# Altium PCB Instrument_droid.PcbDoc (part 1 of 2)
Units mil, origin at the board's own origin, x right, y up, seen from the top; angles counter-clockwise.
Board outline 3674.15 x 2121.53 mil, 4 copper layers (Layer1, Layer2, Layer3, Layer4), stack 23.756 mil thick; 87 components, 48 nets, 303 pads, 89 vias.
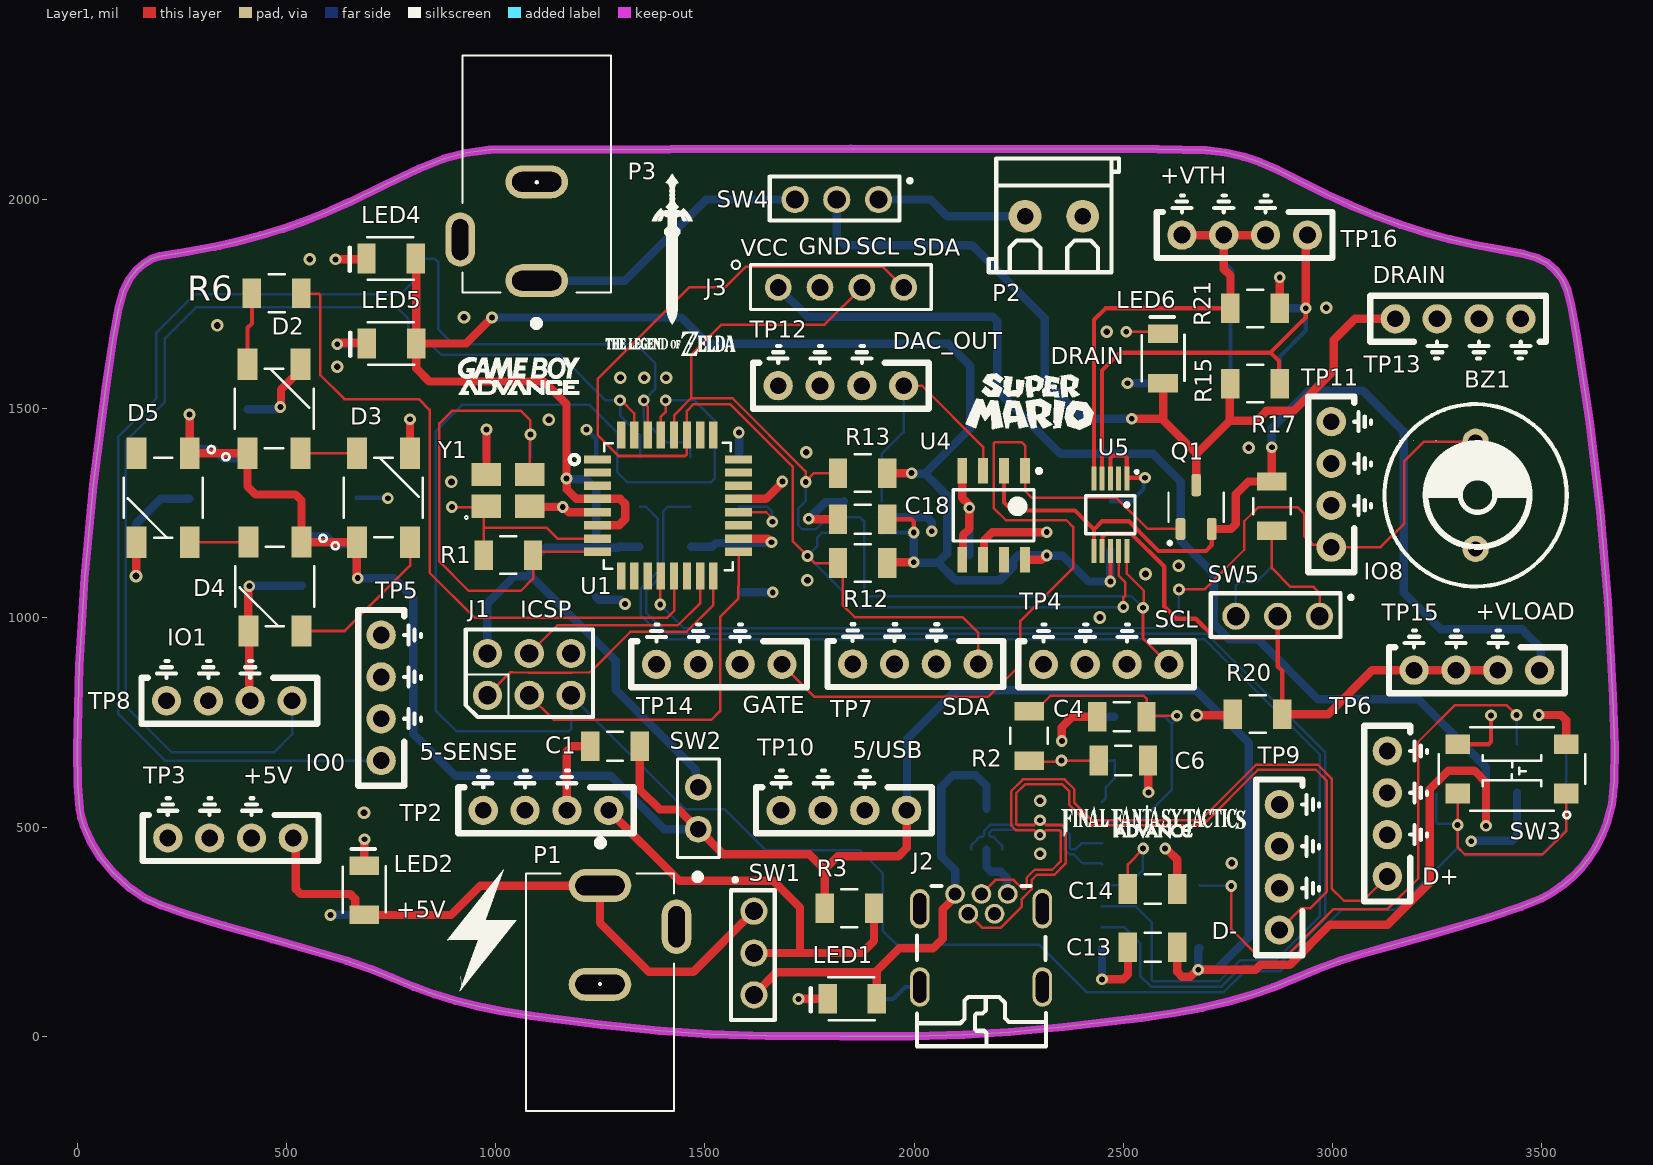
[diagram p0: Layer1 view]
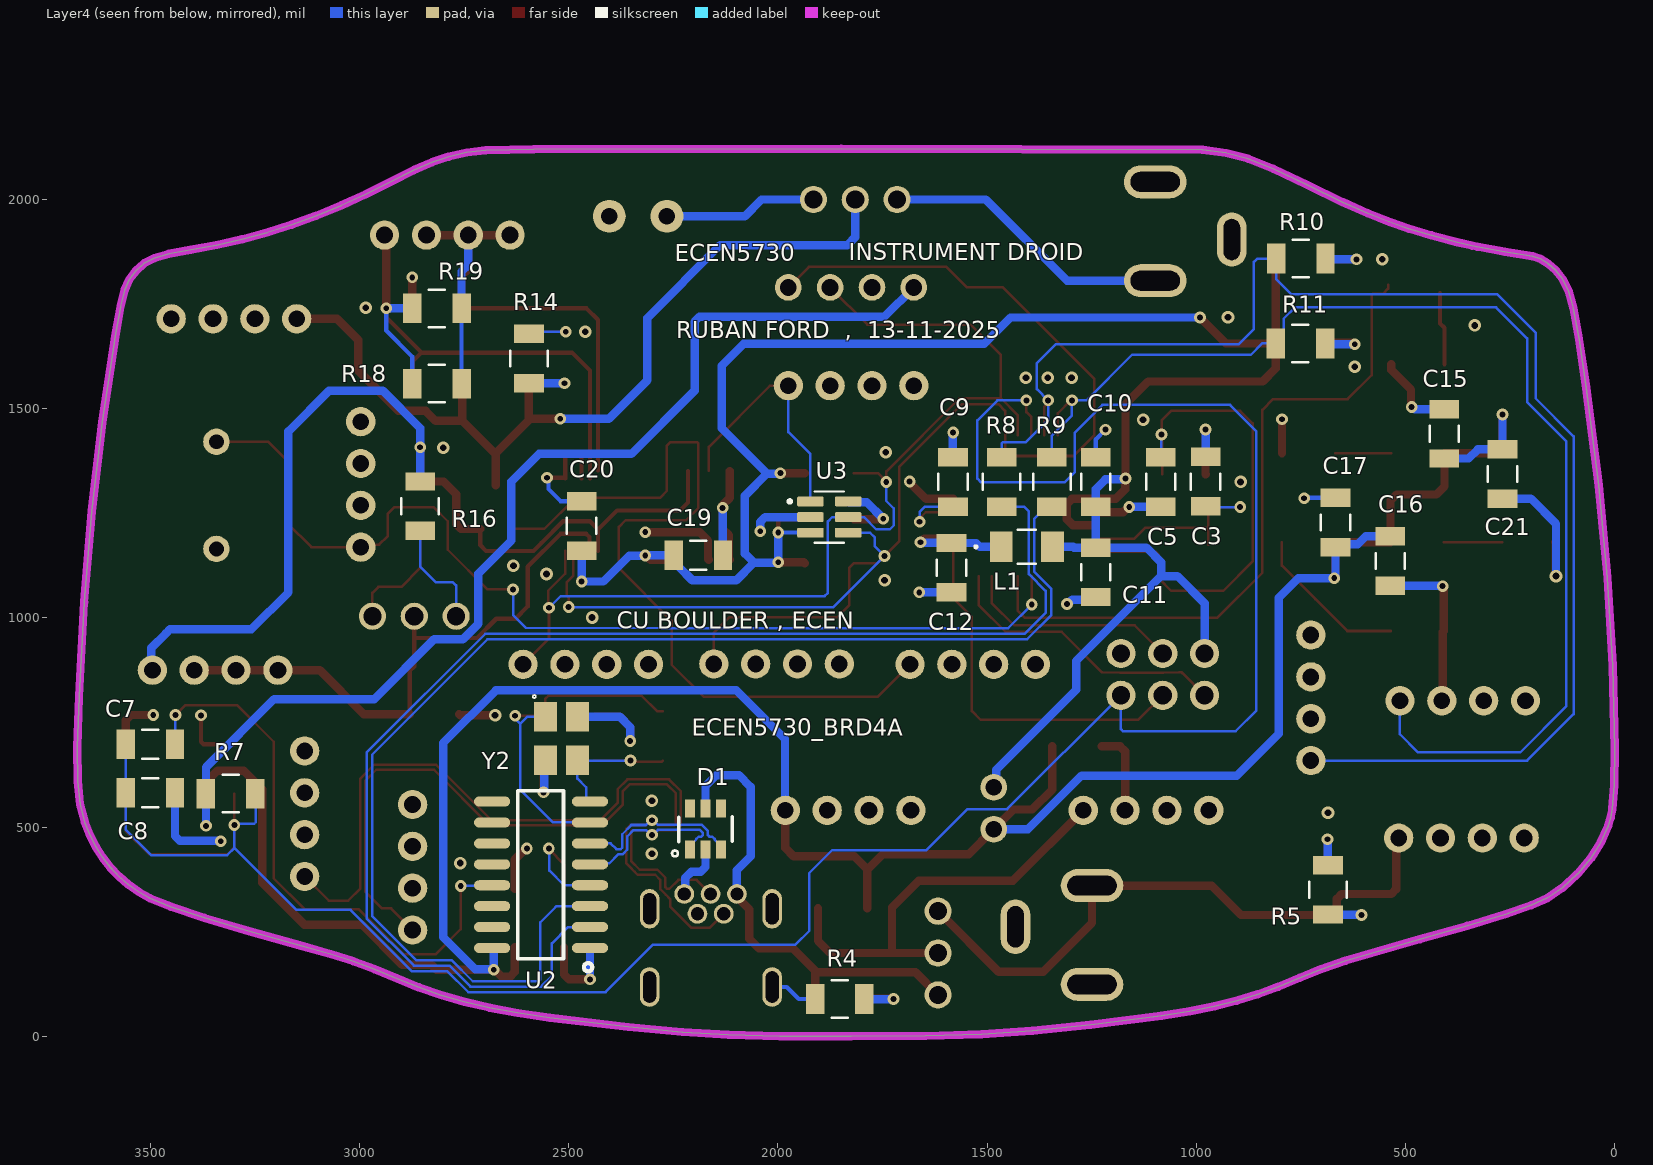
[diagram p1: Layer4 view, seen from below]
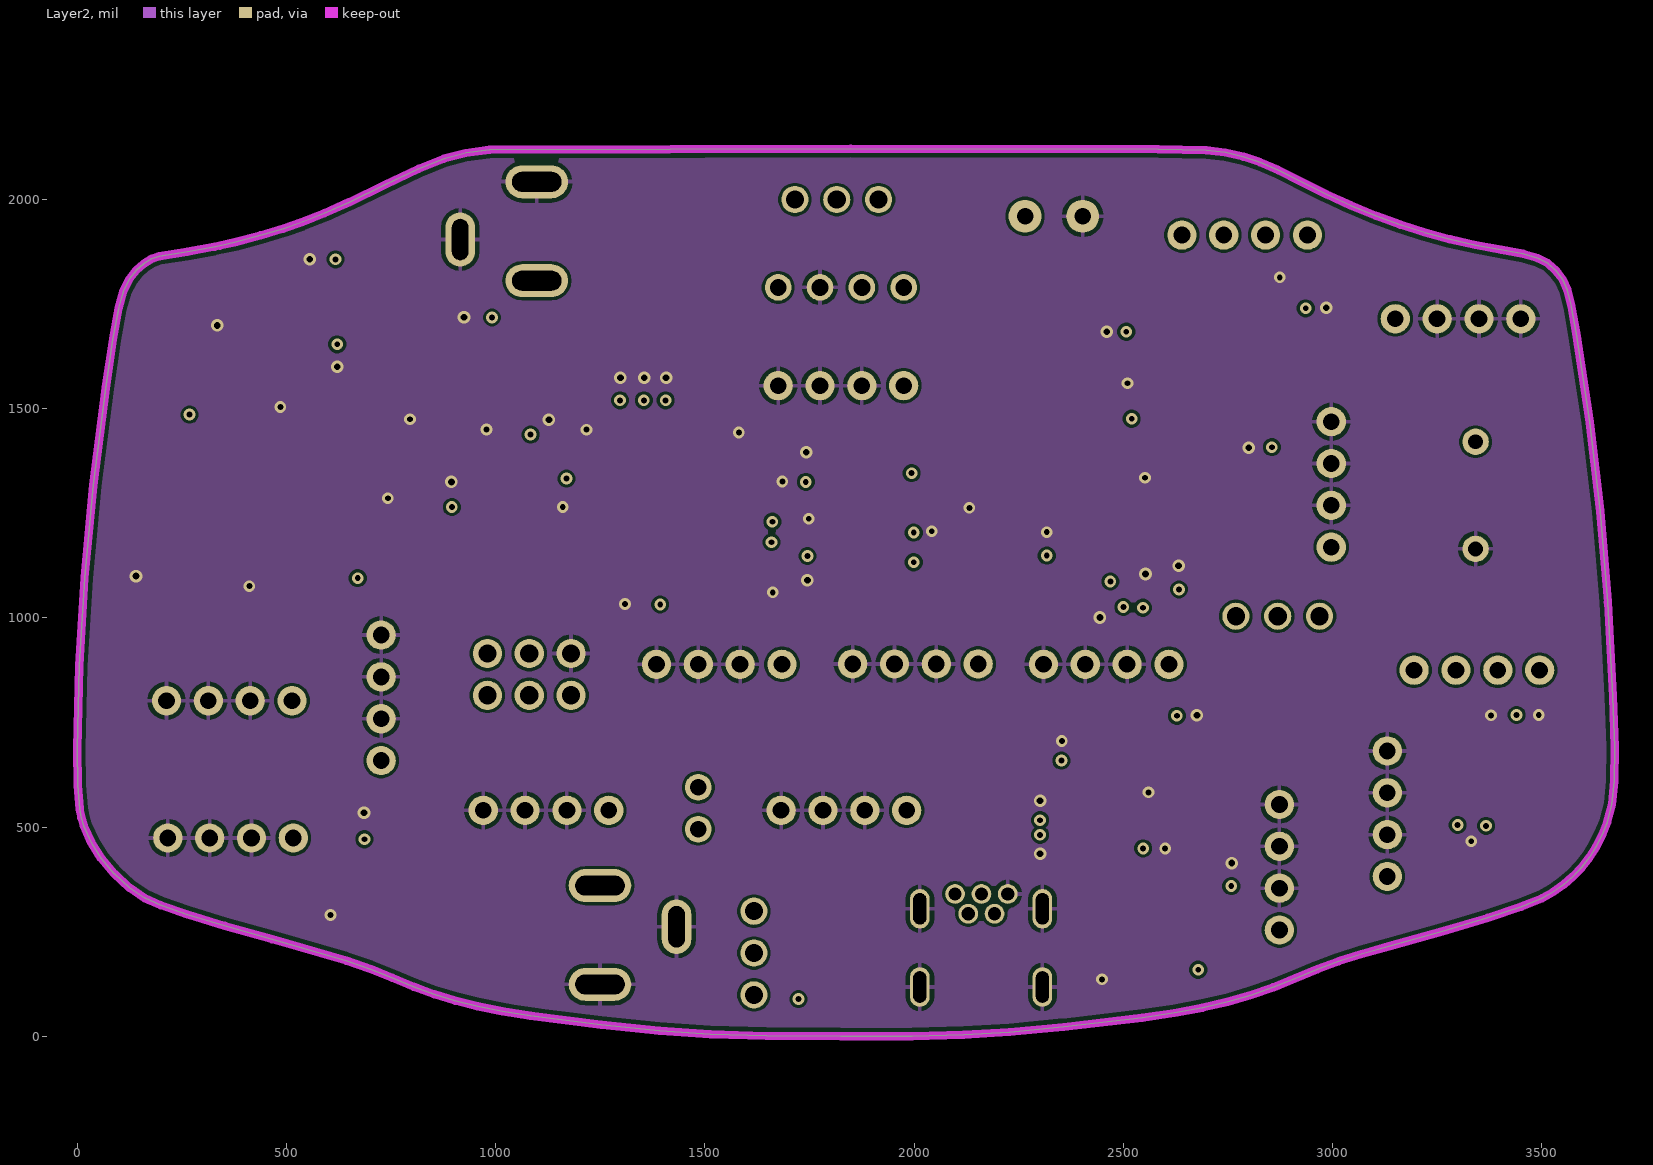
[diagram p2: Layer2]
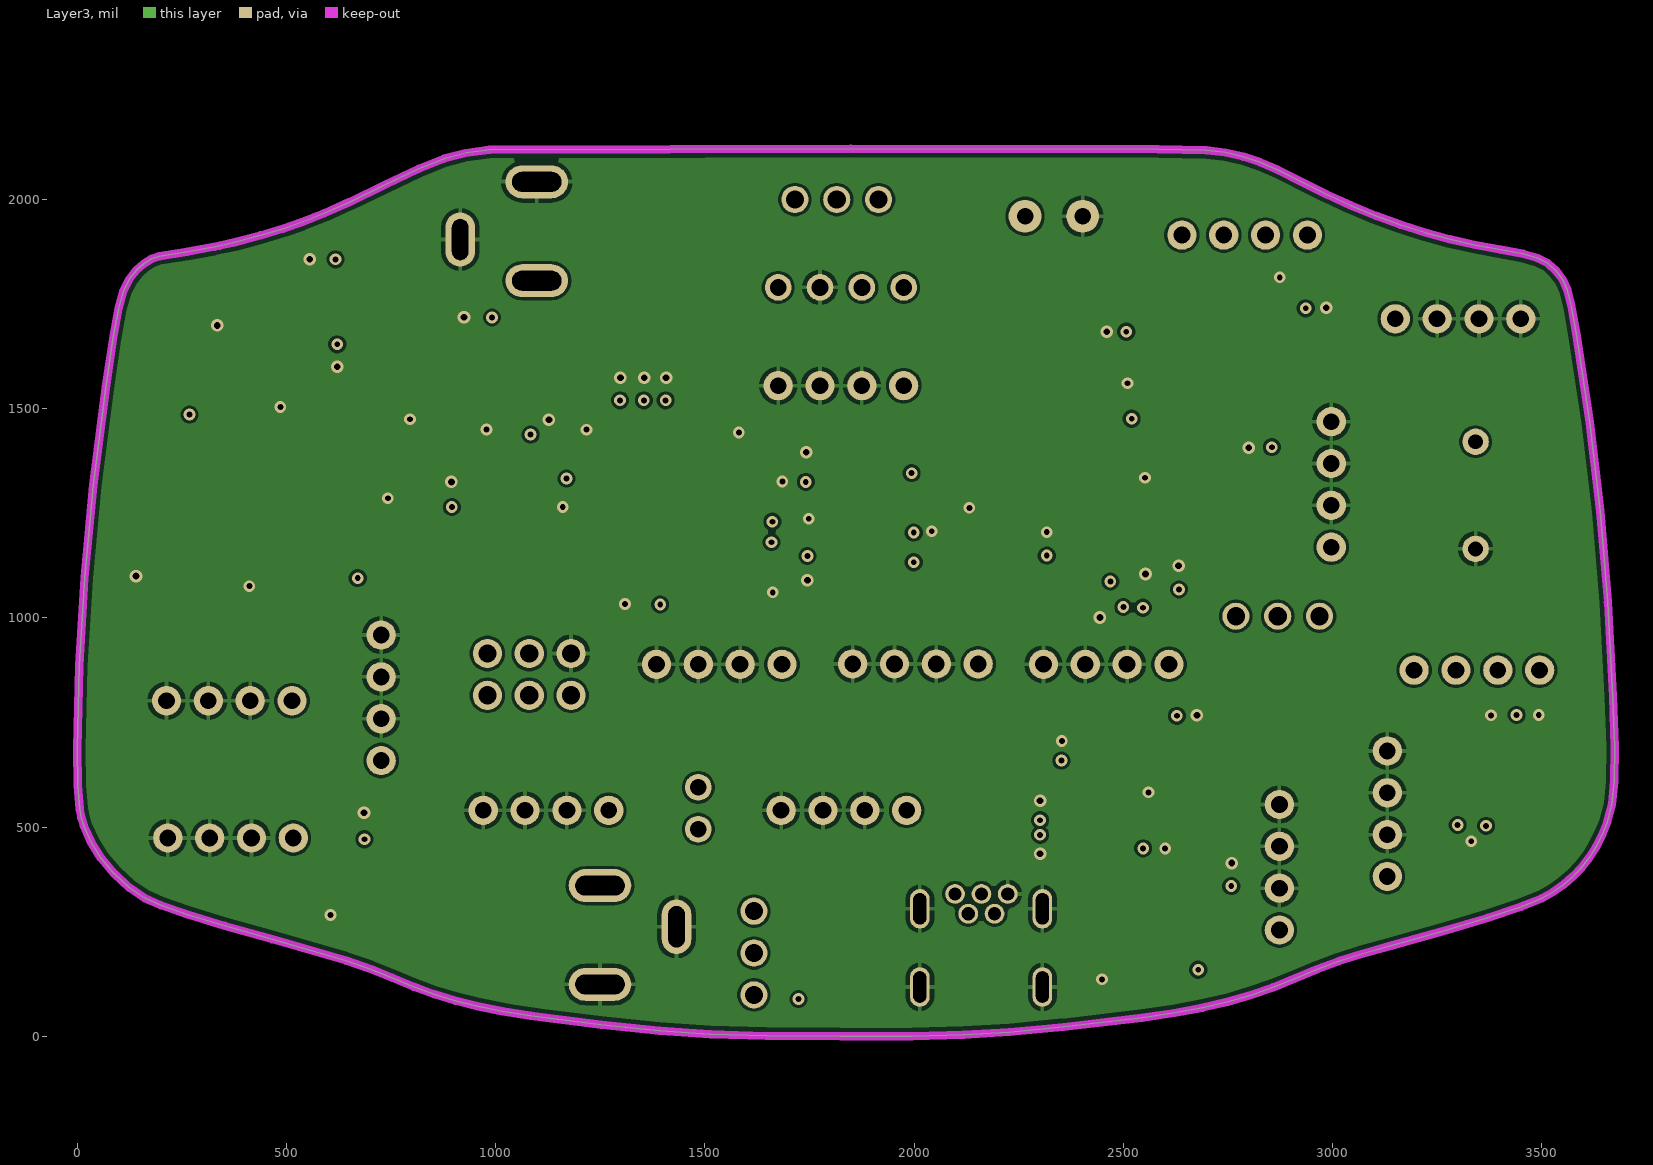
[diagram p3: Layer3]
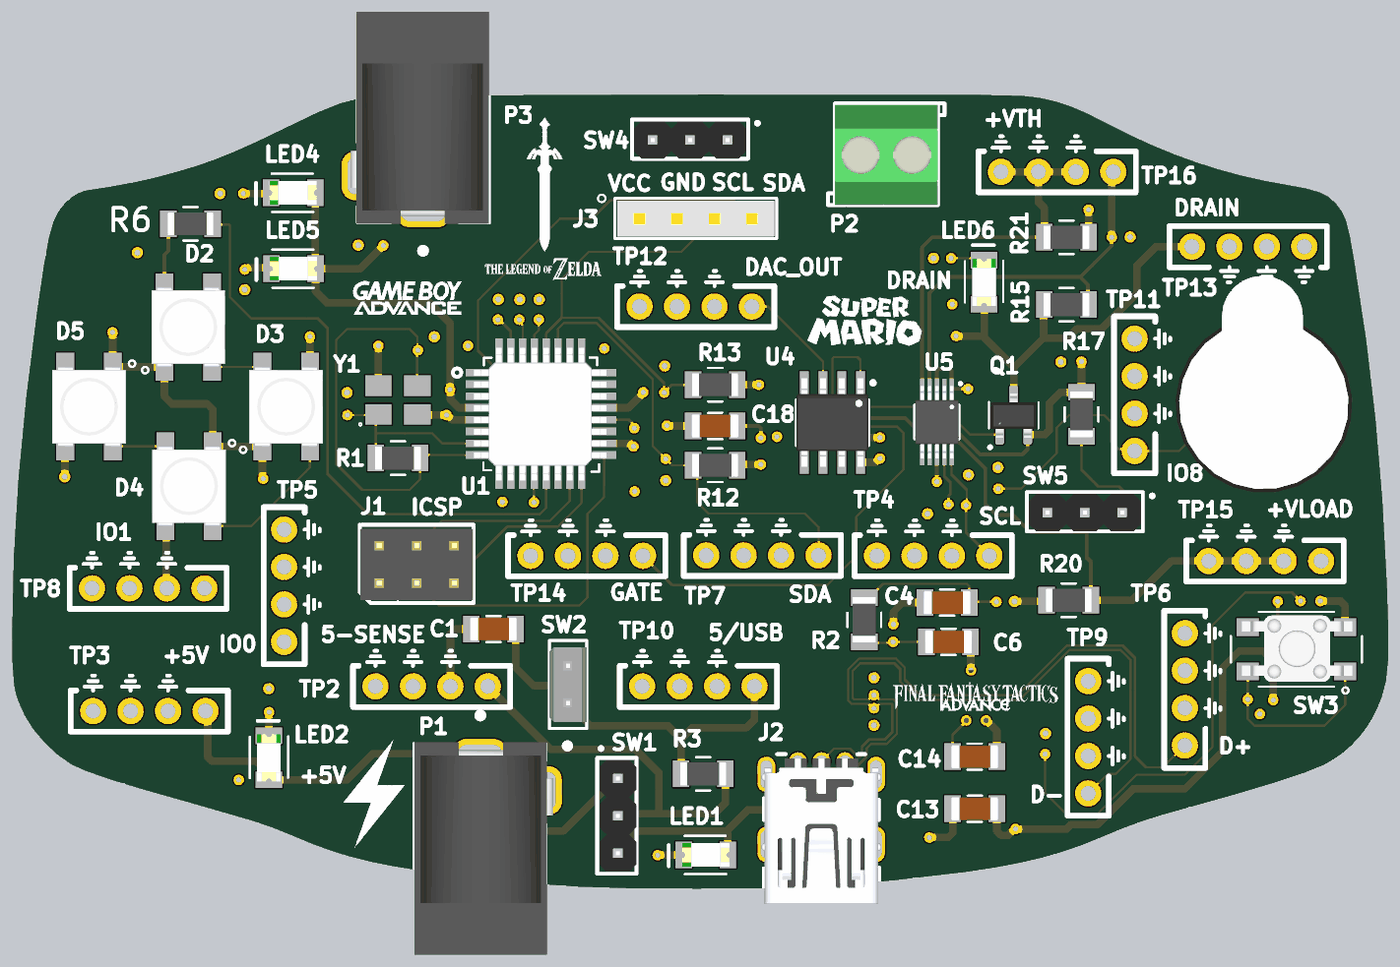
[diagram p5: 3D render of the assembled board from above, using the file's embedded part models]
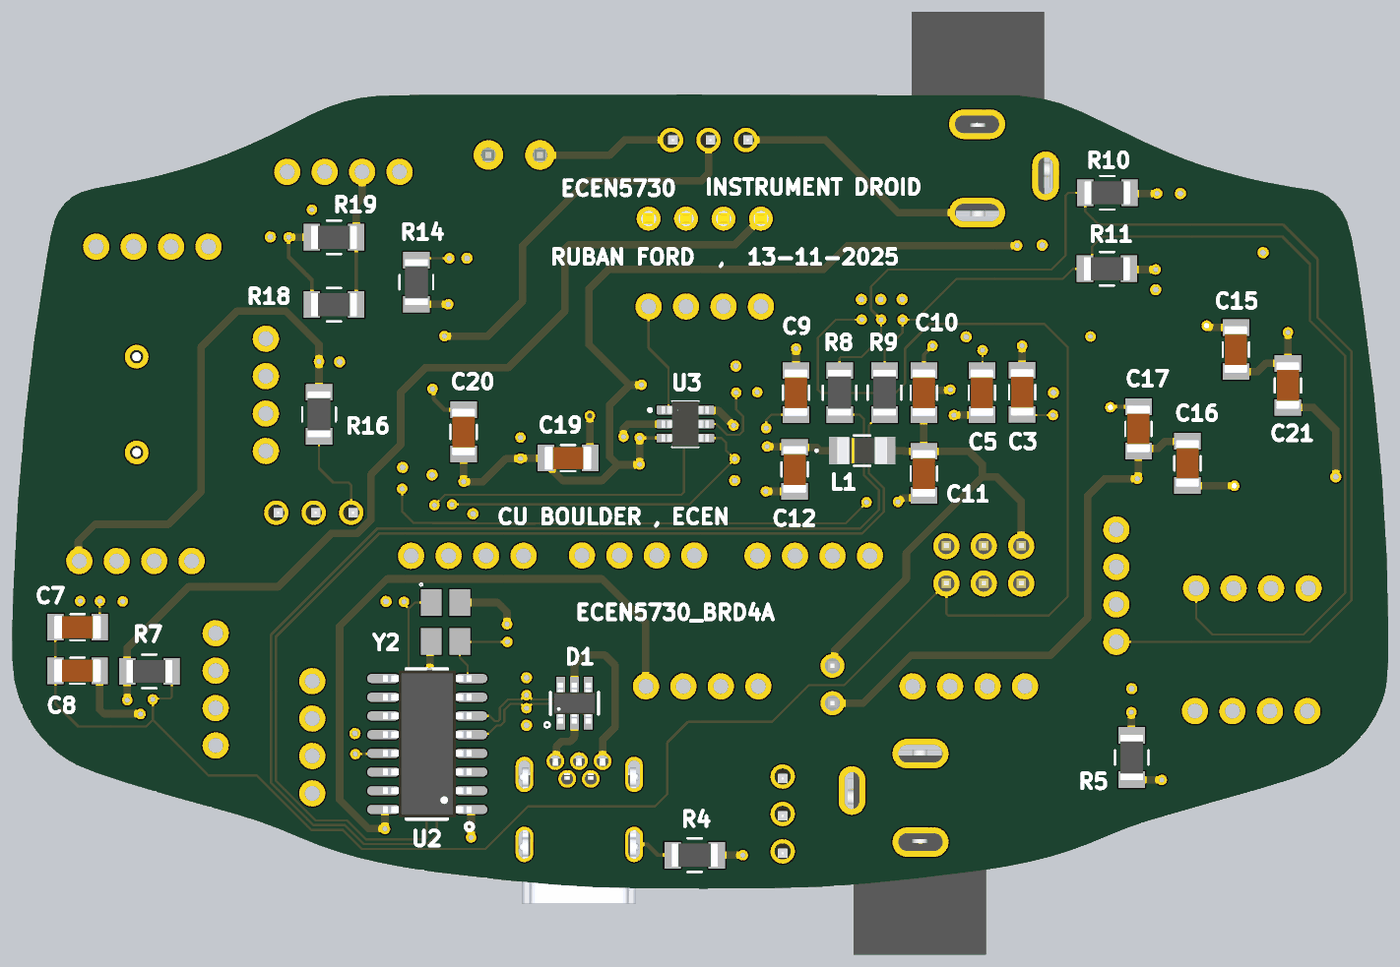
[diagram p6: 3D render of the assembled board from below, using the file's embedded part models]

## Layer stack, top to bottom
Top Solder: solder mask 0.4, Solder Resist, Dk 3.5
Layer1: signal copper 1.4
Dielectric 2: prepreg 2.8, PP-006, Dk 4.1
Layer2: signal copper 1.378
Dielectric 1: dielectric 12.6, FR-4, Dk 4.8
Layer3: signal copper 1.378
Dielectric 3: prepreg 2.8, PP-006, Dk 4.1
Layer4: signal copper 1.4
Bottom Solder: solder mask 0.4, Solder Resist, Dk 3.5

## Board outline
160,330.66 199.58,313.21 263.6,290.99 352.07,263.99 465,232.21 642.58,180.89 700.84,160.68 752.36,139.72 803.34,118.57 852.66,100.56 902.79,85.15 956.22,71.77 1015.42,59.87 1082.88,48.89 1252.5,27.46 1391.35,13.19 1512.74,4.79 1647.14,0.78 1825,-0.33 1995.1,0.28 2118.26,3.3 2227.92,10.17 2357.5,22.3 2545.57,44.15 2621.91,55.76 2689.23,68.4 2749.6,82.51 2805.1,98.52 2857.81,116.88 2909.81,138 2964.17,160.6 3014.99,179.34 3069.49,196.69 3134.88,215.13 3263.58,251.04 3370.75,283.18 3451.46,310.01 3500.79,329.98 3527.41,344.99 3552.14,362.38 3574.91,382.05 3595.63,403.91 3614.24,427.87 3630.64,453.83 3644.76,481.71 3656.52,511.41 3667.89,554.47 3673.56,609.46 3674.17,690.56 3670.39,812 3658.29,1037.81 3639.91,1254.87 3614.82,1467.52 3582.58,1680.09 3571.19,1743.81 3561.47,1783.35 3550.19,1808.68 3534.13,1829.72 3515.18,1847.28 3490.85,1860.04 3455.51,1870.17 3403.54,1879.83 3341.63,1891.21 3280.92,1904.95 3221.11,1921.16 3161.91,1939.95 3103.02,1961.41 3044.15,1985.65 2984.99,2012.76 2925.24,2042.85 2870.66,2070.42 2826.8,2089.44 2786.75,2102.58 2743.58,2112.47 2698.27,2117.81 2583.46,2120.56 1848.58,2121.2 985,2118.77 927.8,2111.27 875.82,2097.73 815.93,2073.73 735,2034.87 650.13,1993.94 590,1967.23 537.5,1946.33 492.28,1930.52 437.5,1914.25 376.25,1897.88 340,1889.87 328.66,1887.44 262.41,1875.04 196.16,1864.75 177.3,1858.28 158.46,1846.65 140.76,1830.71 125.32,1811.29 110.67,1783.11 98.24,1739.49 84.93,1666.32 67.62,1549.5 38.06,1317.04 16.95,1095.87 4.27,885.84 0.03,686.8 0.94,599.76 5.29,543.77 9.49,522.5 15.44,503.1 33.77,462 56.89,425.14 88.29,388.2 123.99,355.32

## Design rules (kind name [scope] priority, off if disabled: settings)
AssemblyTestPointUsage [All] p1: isadvanced=TRUE
AssemblyTestpoint [All] p1: isadvanced=TRUE testpointundercomponent=TRUE minsize=40 maxsize=100 preferedsize=60 minholesize=0 maxholesize=40 preferedholesize=32 testpointgrid=1 usegrid=TRUE gridtolerance=0.01 allowsidetop=TRUE allowsidebottom=TRUE
Clearance Clearance_1 [InNetClass('POWER') And (ExistsOnLayer('Layer2') Or ExistsOnLayer('Layer3')) vs InNetClass('default') And (ExistsOnLayer('Layer2') Or ExistsOnLayer('Layer3'))] p1: gap=7 ignorepadtopadclearanceinfootprint=FALSE sourcerule=56 cellrowname=POWER cellrowtype=2 cellcolname=default cellcoltype=2 innerlayers=TRUE
Clearance Clearance_2 [InNetClass('POWER') And (ExistsOnLayer('Layer1') Or ExistsOnLayer('Layer4')) vs InNetClass('default') And (ExistsOnLayer('Layer1') Or ExistsOnLayer('Layer4'))] p2: gap=7 ignorepadtopadclearanceinfootprint=FALSE sourcerule=56 cellrowname=POWER cellrowtype=2 cellcolname=default cellcoltype=2 outerlayers=TRUE
Clearance Clearance_3 [InNetClass('POWER') vs InNetClass('default')] p3: gap=10 ignorepadtopadclearanceinfootprint=FALSE sourcerule=56 cellrowname=POWER cellrowtype=2 cellcolname=default cellcoltype=2
Clearance Clearance_1 [InNetClass('default') And (ExistsOnLayer('Layer2') Or ExistsOnLayer('Layer3')) vs (ExistsOnLayer('Layer2') Or ExistsOnLayer('Layer3'))] p4: gap=7 ignorepadtopadclearanceinfootprint=FALSE sourcerule=56 cellrowname=default cellrowtype=2 cellcolname=All cellcoltype=0 innerlayers=TRUE
Clearance Clearance_2 [InNetClass('default') And (ExistsOnLayer('Layer1') Or ExistsOnLayer('Layer4')) vs (ExistsOnLayer('Layer1') Or ExistsOnLayer('Layer4'))] p5: gap=7 ignorepadtopadclearanceinfootprint=FALSE sourcerule=56 cellrowname=default cellrowtype=2 cellcolname=All cellcoltype=0 outerlayers=TRUE
Clearance Clearance_3 [InNetClass('default')] p6: gap=10 ignorepadtopadclearanceinfootprint=FALSE sourcerule=56 cellrowname=default cellrowtype=2 cellcolname=All cellcoltype=0
Clearance Clearance_1 [InNetClass('default') And (ExistsOnLayer('Layer2') Or ExistsOnLayer('Layer3')) vs InNetClass('default') And (ExistsOnLayer('Layer2') Or ExistsOnLayer('Layer3'))] p7: gap=7 ignorepadtopadclearanceinfootprint=FALSE sourcerule=56 cellrowname=default cellrowtype=2 cellcolname=default cellcoltype=2 innerlayers=TRUE
Clearance Clearance_2 [InNetClass('default') And (ExistsOnLayer('Layer1') Or ExistsOnLayer('Layer4')) vs InNetClass('default') And (ExistsOnLayer('Layer1') Or ExistsOnLayer('Layer4'))] p8: gap=7 ignorepadtopadclearanceinfootprint=FALSE sourcerule=56 cellrowname=default cellrowtype=2 cellcolname=default cellcoltype=2 outerlayers=TRUE
Clearance Clearance_3 [InNetClass('default') vs InNetClass('default')] p9: gap=10 ignorepadtopadclearanceinfootprint=FALSE sourcerule=56 cellrowname=default cellrowtype=2 cellcolname=default cellcoltype=2
Clearance Clearance_1 [(ExistsOnLayer('Layer2') Or ExistsOnLayer('Layer3')) vs (ExistsOnLayer('Layer2') Or ExistsOnLayer('Layer3'))] p10: gap=7 ignorepadtopadclearanceinfootprint=FALSE sourcerule=56 cellrowname=All cellrowtype=0 cellcolname=All cellcoltype=0 innerlayers=TRUE
Clearance Clearance_2 [(ExistsOnLayer('Layer1') Or ExistsOnLayer('Layer4')) vs (ExistsOnLayer('Layer1') Or ExistsOnLayer('Layer4'))] p11: gap=7 ignorepadtopadclearanceinfootprint=FALSE sourcerule=56 cellrowname=All cellrowtype=0 cellcolname=All cellcoltype=0 outerlayers=TRUE
Clearance [All] p12: gap=10 ignorepadtopadclearanceinfootprint=FALSE ismatrix=TRUE miname0=default mitype0=2 miname1=POWER mitype1=2
ComponentClearance [All] p1: isadvanced=TRUE gap=10 collisioncheckmode=3 verticalgap=10 showdistances=FALSE
DiffPairsRouting DifferentialPairsRouting_1 [InDifferentialPairClass('All Differential Pairs')] p1: maxlimit=10 minlimit=6 mostfreqgap=6 toplayer_minwidth=6 toplayer_maxwidth=6 toplayer_prefwidth=6 midlayer1_minwidth=6 midlayer1_maxwidth=6 midlayer1_prefwidth=6 midlayer2_minwidth=6 midlayer2_maxwidth=6 midlayer2_prefwidth=6 bottomlayer_minwidth=6 bottomlayer_maxwidth=6 bottomlayer_prefwidth=6 maxuncoupledlength=500
DiffPairsRouting [All] p2: maxlimit=10 minlimit=10 mostfreqgap=10 toplayer_minwidth=15 toplayer_maxwidth=15 toplayer_prefwidth=15 midlayer1_minwidth=15 midlayer1_maxwidth=15 midlayer1_prefwidth=15 midlayer2_minwidth=15 midlayer2_maxwidth=15 midlayer2_prefwidth=15 bottomlayer_minwidth=15 bottomlayer_maxwidth=15 bottomlayer_prefwidth=15 maxuncoupledlength=500
FabricationTestPointUsage [All] p1: isadvanced=TRUE valid=0 allowmultiple=FALSE
FabricationTestpoint [All] p1: isadvanced=TRUE side=3 testpointundercomponent=TRUE minsize=40 maxsize=100 preferedsize=60 minholesize=0 maxholesize=40 preferedholesize=32 testpointgrid=1 allowsidetop=TRUE allowsidebottom=TRUE usegrid=TRUE gridtolerance=0.01
FanoutControl Fanout_BGA [IsBGA] p1: isadvanced=TRUE bgadir=Out bgaviamode=Centered fanoutstyle=Auto fanoutdirection=Alternating viagrid=1 // Fanout_BGA (Default Rule)
FanoutControl Fanout_LCC [IsLCC] p2: isadvanced=TRUE bgadir=Out bgaviamode=Centered fanoutstyle=Auto fanoutdirection=Alternating viagrid=1 // Fanout_LCC (Default Rule)
FanoutControl Fanout_SOIC [IsSOIC] p3: isadvanced=TRUE bgadir=Out bgaviamode=Centered fanoutstyle=Auto fanoutdirection=Alternating viagrid=1 // Fanout_SOIC (Default Rule)
FanoutControl Fanout_Small [(CompPinCount < 5)] p4: isadvanced=TRUE bgadir=Out bgaviamode=Centered fanoutstyle=Auto fanoutdirection=OutThenIn viagrid=1 // Fanout_Small (Default Rule)
FanoutControl Fanout_Default [All] p5: isadvanced=TRUE bgadir=Out bgaviamode=Centered fanoutstyle=Auto fanoutdirection=Alternating viagrid=1 // Fanout_Default (Default Rule)
Height [All] p1: isadvanced=TRUE minheight=0 maxheight=1000 prefheight=500
HoleSize [All] p1: isadvanced=TRUE absolutevalues=TRUE maxlimit=100 minlimit=1 maxpercent=80.000 minpercent=20.000
HoleToHoleClearance [All] p1: isadvanced=TRUE gap=10 allowstackedmicrovias=TRUE
LayerPairs [All] p1: isadvanced=TRUE enforce=TRUE
MinimumSolderMaskSliver [All] p1: isadvanced=TRUE minsoldermaskwidth=6
NetAntennae [All] p1: isadvanced=TRUE netantennaetolerance=0
PasteMaskExpansion [All] p1: isadvanced=TRUE expansion=0
PlaneClearance [All] p1: isadvanced=TRUE clearance=20
PlaneConnect [All] p1: isadvanced=TRUE pad.planeconnectstyle=Relief pad.reliefexpansion=20 pad.reliefentries=4 pad.reliefconductorwidth=10 pad.reliefairgap=10 via.planeconnectstyle=Direct via.reliefexpansion=20 via.reliefentries=4 via.reliefconductorwidth=10 via.reliefairgap=10
PolygonConnect [All] p1: thpad.connectstyle=Relief thpad.reliefconductorwidth=10 thpad.reliefentries=4 thpad.polygonreliefangle="90 Angle" thpad.airgapwidth=10 smdpad.connectstyle=Relief smdpad.reliefconductorwidth=10 smdpad.reliefentries=4 smdpad.polygonreliefangle="90 Angle" smdpad.airgapwidth=10 via.connectstyle=Direct via.reliefconductorwidth=10 via.reliefentries=4 via.polygonreliefangle="90 Angle" via.airgapwidth=10
RoutingCorners [All] p1: isadvanced=TRUE cornerstyle=45-Degree minsetback=100 maxsetback=100
RoutingLayers RoutingLayers_1 [All] p1: isadvanced=TRUE top layer_v5=TRUE mid layer 1_v5=FALSE mid layer 2_v5=FALSE bottom layer_v5=TRUE
RoutingLayers [All] p2: top layer_v5=TRUE mid layer 1_v5=TRUE mid layer 2_v5=TRUE bottom layer_v5=TRUE
RoutingPriority [All] p1: isadvanced=TRUE routingpriority=0
RoutingVias [All] p1: holewidth=14 width=28 viastyle="Through Hole" minholewidth=14 minwidth=28 maxholewidth=14 maxwidth=28
ShortCircuit [All] p1: isadvanced=TRUE allowed=FALSE
SilkToSilkClearance [All] p1: isadvanced=TRUE silktosilkclearance=6
SilkToSolderMaskClearance [IsPad] p1: isadvanced=TRUE minsilkscreentomaskgap=6 clearancetoexposedcopper=TRUE
SolderMaskExpansion [All] p1: isadvanced=TRUE expansion=4 istentingtop=FALSE
SupplyNets "Schematic Supply Nets_6" [InNet('+USB_VCC')] p1: isadvanced=TRUE voltage=0.000
SupplyNets "Schematic Supply Nets_5" [InNet('+5/USB')] p2: isadvanced=TRUE voltage=0.000
SupplyNets "Schematic Supply Nets_4" [InNet('+5/USB_SENSE')] p3: isadvanced=TRUE voltage=0.000
SupplyNets "Schematic Supply Nets_3" [InNet('GND')] p4: isadvanced=TRUE voltage=0.000
SupplyNets "Schematic Supply Nets_2" [InNet('+ARDPWR')] p5: isadvanced=TRUE voltage=0.000
SupplyNets "Schematic Supply Nets_1" [InNet('+5V')] p6: isadvanced=TRUE voltage=0.000
UnRoutedNet [All] p1: isadvanced=TRUE
UnpouredPolygon [All] p1: isadvanced=TRUE
Width MaxMinWidth_3 [InNet('GND')] p1: maxlimit=20 minlimit=10 preferedwidth=20 minimp=50.000000 maximp=50.000000 favimp=50.000000
Width MaxMinWidth_2 [InNetClass('POWER')] p2: maxlimit=20 minlimit=10 preferedwidth=20 minimp=50.000000 maximp=50.000000 favimp=50.000000
Width MaxMinWidth_1 [InNetClass('default')] p3: maxlimit=6 minlimit=6 preferedwidth=6 minimp=50.000000 maximp=50.000000 favimp=50.000000
Width [All] p4: maxlimit=10 minlimit=10 preferedwidth=10
2 further rules are at their usual default settings.

## Classes and differential pairs
net class POWER: +5/USB +5/USB_SENSE +5V +ARDPWR +AVCC +MOS_D +USB_VCC +VDEVICE +VLOAD +VTERMINAL +VTH -VLOAD -VTH NetLED1_2 NetLED2_2 NetLED4_2 NetLED5_2
net class default: AD4/SDA AD5/SCL AREF CXTAL1 CXTAL2 D+ D- DAC_OUT DTR IO0 IO1 IO8 IO9 MISO MOS_GATE MOSI NetC14_2 NetD2_2 NetD3_2 NetD4_2 NetLED6_2 NetR16_1 NetR17_1 RESET RXD SCK TXD XTAL1 XTAL2
component class Sheet2: C15 C16 C17 C18 C19 C20 C21 D2 D3 D4 D5 J3 LED6 P2 P3 Q1 R6 R12 R13 R14 R15 R16 R17 R18 R19 R20 R21 SW4 SW5 TP12 TP13 TP14 TP15 TP16 U3 U4 U5
component class Sheet1: BZ1 C1 C3 C4 C5 C6 C7 C8 C9 C10 C11 C12 C13 C14 D1 J1 J2 L1 LED1 LED2 LED4 LED5 P1 R1 R2 R3 R4 R5 R7 R8 R9 R10 R11 SW1 SW2 SW3 TP2 TP3 TP4 TP5 TP6 TP7 TP8 TP9 TP10 TP11 U1 U2 Y1 Y2
differential pair D_D: +D+ -D-

## Components (designator, comment, footprint, x,y, rotation, side; value= is the part's Value field where it differs from the comment)
BZ1 "AT-1224-TWT-5V-2-R" "BUZZER- TH" 3342,1293 r0 top
C1 "22uF" 1206_Passive_Capacitor 1285,693 r0 top
C3 "22pF" 1206_Passive_Capacitor 977.53,1325.84 r270 bottom
C4 "22pF" 1206_Passive_Capacitor 2496.38,763.94 r0 top
C5 "22pF" 1206_Passive_Capacitor 1085,1325 r90 bottom
C6 "22pF" 1206_Passive_Capacitor 2500,659 r180 top
C7 "1uF" 1206_Passive_Capacitor 3499.84,698.11 r180 bottom
C8 "47nF" 1206_Passive_Capacitor 3500,581.89 r0 bottom
C9 "22uF" 1206_Passive_Capacitor 1581.5,1325 r270 bottom
C10 "22uF" 1206_Passive_Capacitor 1240,1325 r270 bottom
C11 "22uF" 1206_Passive_Capacitor 1240,1109 r90 bottom
C12 "22uF" 1206_Passive_Capacitor 1585,1120 r90 bottom
C13 "22uF" 1206_Passive_Capacitor 2570,213 r0 top
C14 "22uF" 1206_Passive_Capacitor 2570,352 r180 top
C15 "22uF" 1206_Passive_Capacitor 407,1440 r270 bottom
C16 "22uF" 1206_Passive_Capacitor 536,1136 r90 bottom
C17 "22uF" 1206_Passive_Capacitor 667,1228 r270 bottom
C18 "22uF" 1206_Passive_Capacitor 1877,1236 r0 top
C19 "22uF" 1206_Passive_Capacitor 2190,1150 r0 bottom
C20 "22uF" 1206_Passive_Capacitor 2469,1220 r270 bottom
C21 "22uF" 1206_Passive_Capacitor 268,1344 r90 bottom
D1 "TESD5V0V4UCX6" "TVS - TESD" 2173,495 r90 bottom value="TVS DIODE 5.5V 6TSOP"
D2 "IN-PI55QATPRPGPBPW" "SERIAL_LED - duplicate" 470,1500 r90 top
D3 "IN-PI55QATPRPGPBPW" "SERIAL_LED - duplicate" 731.5,1287.4 r90 top
D4 "IN-PI55QATPRPGPBPW" "SERIAL_LED - duplicate" 472,1075 r270 top
D5 "IN-PI55QATPRPGPBPW" "SERIAL_LED - duplicate" 205,1287.4 r270 top
J1 "NRPN032PAEN-RC" ICSP 980,815 r90 top
J2 "USB Mini" USB_MINI_B 2160,229 r0 top value="USB mini B"
J3 "SAMTEC-SSQ-104-01-X-SJ" JF-4_SSQ-104-01-X-S 1825,1790 r0 top
L1 "FB_10uH_1206" AIML-1206_ABR-M 1405,1170 r180 bottom
LED1 "Red" LED_1206 1852,89.5 r180 top
LED2 "Red" LED_1206 685.5,349 r90 top
LED4 "Red" LED_1206 750,1859 r180 top
LED5 "Red" LED_1206 751,1656 r180 top
LED6 "Red" LED_1206 2595,1620 r90 top
P1 "Power Jack" Power_Jack 1249,360.22 r270 top value="CONN PWR JACK 2X5.5MM SOLDER"
P2 "2P Screw Terminal Block" "P_Terminal block 3.5mm-pitch" 2333.9,1960 r0 top
P3 "Power Jack" Power_Jack 1098,1806 r90 top value="CONN PWR JACK 2X5.5MM SOLDER"
Q1 "AO3400A" N-MOSFET 2674,1265 r90 top value="N channel"
R1 "1M" 1206_Passive_Resitor 1030,1150 r0 top value="1M Ohm"
R2 "1M" 1206_Passive_Resitor 2275,718 r270 top value="1M Ohm"
R3 "500m" 1206_Passive_Resitor 1845,306 r180 top value=500mOhm
R4 "1k" 1206_Passive_Resitor 1852,89 r180 bottom value="1K Ohm"
R5 "1k" 1206_Passive_Resitor 685,350 r90 bottom value="1K Ohm"
R6 "300 Ohm" 1206_Passive_Resitor 476,1776 r0 top value=300Ohm
R7 "10k" 1206_Passive_Resitor 3308,580 r0 bottom value=10KOhm
R8 "1k" 1206_Passive_Resitor 1465,1325 r270 bottom value="1K Ohm"
R9 "1k" 1206_Passive_Resitor 1345,1325 r270 bottom value="1K Ohm"
R10 "1k" 1206_Passive_Resitor 750,1859 r180 bottom value="1K Ohm"
R11 "1k" 1206_Passive_Resitor 751,1656 r180 bottom value="1K Ohm"
R12 "10k" 1206_Passive_Resitor 1877,1131 r0 top value=10KOhm
R13 "10k" 1206_Passive_Resitor 1877,1346 r0 top value=10KOhm
R14 "1k" 1206_Passive_Resitor 2595,1620 r90 bottom value="1K Ohm"
R15 "10k" 1206_Passive_Resitor 2815,1560 r180 top value=10KOhm
R16 "1 Ohm" 1206_Passive_Resitor 2855,1267 r90 bottom value=1Ohm
R17 "10 Ohm" 1206_Passive_Resitor 2855,1267 r90 top
R18 "10k" 1206_Passive_Resitor 2815,1560 r0 bottom value=10KOhm
R19 "10k" 1206_Passive_Resitor 2815,1740 r0 bottom value=10KOhm
R20 "0 Ohm" 1206_Passive_Resitor 2821,770 r0 top
R21 "0 Ohm" 1206_Passive_Resitor 2815,1740 r180 top
SW1 "PREC003SAAN-RC" 3_PIN_100mil 1617,299 r270 top value="CONN HEADER VERT 3POS 2.54MM"
SW2 "SW_2Pin_100mil_Switch" 2Pin-Header-Conn 1484,495 r90 top
SW3 "TL3305AF160QG" Switch_JLC 3428.92,639.06 r180 top
SW4 "PREC003SAAN-RC" 3_PIN_100mil 1915,2000 r180 top value="CONN HEADER VERT 3POS 2.54MM"
SW5 "PREC003SAAN-RC" 3_PIN_100mil 2969,1004 r180 top value="CONN HEADER VERT 3POS 2.54MM"
TP2 "10x Probe TP" TP10x_Probe 1120,540 r180 top
TP3 "10x Probe TP" TP10x_Probe 366,474 r180 top
TP4 "10x Probe TP" TP10x_Probe 2459,889 r180 top
TP5 "10x Probe TP" TP10x_Probe 726,809 r90 top
TP6 "10x Probe TP" TP10x_Probe 3131,532 r90 top
TP7 "10x Probe TP" TP10x_Probe 2003,890 r180 top
TP8 "10x Probe TP" TP10x_Probe 363,802 r180 top
TP9 "10x Probe TP" TP10x_Probe 2873,404 r90 top
TP10 "10x Probe TP" TP10x_Probe 1832,540 r180 top
TP11 "10x Probe TP" TP10x_Probe 2997,1319 r90 top
TP12 "10x Probe TP" TP10x_Probe 1825,1555 r180 top
TP13 "10x Probe TP" TP10x_Probe 3300,1715 r0 top
TP14 "10x Probe TP" TP10x_Probe 1534,889 r180 top
TP15 "10x Probe TP" TP10x_Probe 3345,875 r180 top
TP16 "10x Probe TP" TP10x_Probe 2790,1915 r180 top
U1 "ATMEGA328P-ANR" ATMega328P 1411.93,1268.5 r180 top value="IC MCU 8BIT 32KB FLASH 32TQFP"
U2 "CH340G" "USB to serial" 2566,386 r90 bottom value="USB to Serial"
U3 "DAC IC" MCP4725 1877,1241 r180 bottom
U4 "MCP6002T-I/SN" SOIC127P600X175-8N 2190,1245 r270 top
U5 "ADS1115IDGSR" ADC_ADS1115IDGSR 2469,1246.61 r270 top
Y1 "X322516MLB4SI" "Crystal resonator" 1029.5,1307 r0 top value=16MHz
Y2 "X322512MSB4SI" "Crystal resonator" 2515.22,711.97 r270 bottom value=12MHz

## Footprints (in the part's own frame and the unit in brackets; to place one, negate y for a bottom-side part, rotate by r counter-clockwise, add the part's x,y. Pads: shape width x height; smd on the part's side, far side on the other; paste and mask are expansions set on the pad)
2Pin-Header-Conn [mm]
  round 1.62 hole 1.02: 1(0,0) 2(2.54,0)
  silkscreen extent -3.03,-1.27 4.26,1.26, body extent -1.27,-1.27 3.81,1.27, height 8.13
3_PIN_100mil [mm]
  round 1.65 hole 1.1: 1(0,0) 2(2.54,0) 3(5.08,0)
  silkscreen extent -2,-1.4 6.6,1.27, body extent -1.14,-1.27 6.48,1.27, height 8.38
1206_Passive_Capacitor [mil]
  rect 44x71 smd: 1(-59,0) 2(59,0)
  silkscreen extent -19,-35 19,35, body extent -63,-31 63,32, height 50
1206_Passive_Resitor [mil]
  rect 44x71 smd: 1(-59,0) 2(59,0)
  silkscreen extent -19,-45 19,45, body extent -61,-31 61,31, height 26
ADC_ADS1115IDGSR [mm] "*SOP50P490X110-10N"
  rect 1.45x0.3 smd mask+0.025: 1(-2.2,1)
  rect 1.47x0.3 smd mask+0.025: 2(-2.2,0.5) 3(-2.2,0) 4(-2.2,-0.5) 5(-2.2,-1) 6(2.2,-1) 7(2.2,-0.5) 8(2.2,0) 9(2.2,0.5) 10(2.2,1)
  silkscreen extent -2.68,-1.5 1.15,1.68, body extent -2.44,-1.49 2.46,1.51, height 1.1
AIML-1206_ABR-M [mil]
  rect 54x73 smd paste+0 mask+0: 1(-61.5,0) 2(61.5,0)
  silkscreen extent -124,-40 22,40, body extent -66,-36 66,36, height 55
ATMega328P [mm]
  rect 1.65x0.508 smd mask+0.025: 1(4.28,-2.794) 2(4.28,-2.007) 3(4.28,-1.194) 4(4.28,-0.406) 5(4.28,0.406) 6(4.28,1.194) 7(4.28,2.007) 8(4.28,2.794) 17(-4.28,2.794) 18(-4.28,2.007) 19(-4.28,1.194) 20(-4.28,0.406) 21(-4.28,-0.406) 22(-4.28,-1.194) 23(-4.28,-2.007) 24(-4.28,-2.794)
  rect 0.508x1.65 smd mask+0.025: 9(2.843,4.28) 10(2.056,4.28) 11(1.243,4.28) 12(0.455,4.28) 13(-0.357,4.28) 14(-1.145,4.28) 15(-1.958,4.28) 16(-2.745,4.28) 25(-2.745,-4.28) 26(-1.958,-4.28) 27(-1.145,-4.28) 28(-0.357,-4.28) 29(0.455,-4.28) 30(1.243,-4.28) 31(2.056,-4.28) 32(2.843,-4.28)
  silkscreen extent -3.94,-3.81 5.97,3.94, body extent -4.45,-4.47 4.55,4.53, height 1.16
"BUZZER- TH" [mm]
  round 1.6 hole 0.9: 1(0,3.25) 2(0,-3.25)
  silkscreen extent -5.53,-5.54 5.54,5.54, body extent -6,-6 6,8.75, height 9.05
"Crystal resonator" [mm]
  rect 1.8x1.4 smd: 1(-1.32,-1.02) 2(1.32,-1.02) 3(1.32,0.92) 4(-1.32,0.92)
  silkscreen extent -2.63,-1.79 -2.45,-1.61, body extent -1.65,-1.2 1.65,1.2, height 0.8
ICSP [mil]
  round 70 hole 43.31: 1(0,0) 2(0,-100) 3(0,-200) 4(100,0) 5(100,-100) 6(100,-200)
  silkscreen extent -52,-252 157,52, body extent -44,-250 146,50, height 330
JF-4_SSQ-104-01-X-S [mm]
  round 1.62 hole 1.02: 1(-3.81,0) 2(-1.27,0) 3(1.27,0) 4(3.81,0)
  silkscreen extent -6.63,-1.35 5.49,1.63, body extent -5.33,-1.21 5.33,1.21, height 8.51
LED_1206 [mil]
  rect 44x71 smd: 1(-59,0) 2(59,0)
  silkscreen extent -54,-51 99,51, body extent -63,-31 63,31, height 28
MCP4725 [mm]
  rrect25% 1.61x0.59 smd: 1(-1.145,0.95) 2(-1.145,0) 3(-1.145,-0.95) 4(1.145,-0.95) 5(1.145,0) 6(1.145,0.95)
  silkscreen extent -2.5,-1.56 0.9,1.56, body extent -1.6,-1.55 1.6,1.55, height 1.45
N-MOSFET [mm]
  rrect50% 1.35x0.59 smd: 1(-1.33,0.95) 2(-1.33,-0.95) 3(1.33,0)
  silkscreen extent -2.28,-1.68 0.89,1.7, body extent -1.55,-1.55 1.45,1.55, height 1.25
"P_Terminal block 3.5mm-pitch" [mm]
  round 2 hole 1: 1(-1.75,0) 2(1.75,0)
  silkscreen extent -3.95,-3.4 3.95,3.5, body extent -3.5,-3.4 3.5,3.4, height 8.4
Power_Jack [mm]
  oval 2x3.8 hole 1.2 slot 3 at 90 deg: 1(0,0) 2(6,0)
  oval 3.3x1.8 hole 1 slot 2.5 at 0 deg: 3(2.5,4.65)
  silkscreen extent -2.79,-4.5 13.68,4.5, body extent -0.76,-4.45 13.64,4.95, height 11.49
"SERIAL_LED - duplicate" [mil] "Footprint for serial LED"
  rect 74.8x47.5 smd: 1(-106.3,63.5) 2(-106.3,-63.5) 3(106.3,-63.5) 4(106.3,63.5)
  silkscreen extent -124,-94 95,124, body extent -106,-98 106,98, height 63
SOIC127P600X175-8N [mm] "SOIC, 8-Leads, Body 4.90x3.90mm, Pitch 1.27mm, IPC Medium Density"
  rect 1.55x0.6 smd: 1(-2.7,1.905) 2(-2.7,0.635) 3(-2.7,-0.635) 4(-2.7,-1.905) 5(2.7,-1.905) 6(2.7,-0.635) 7(2.7,0.635) 8(2.7,1.905)
  silkscreen extent -2.82,-2.45 1.55,2.88, body extent -3,-2.45 3,2.45, height 1.75
Switch_JLC [mm]
  rect 1.5x1.2 smd: 1(-3.3,1.5) 2(3.3,1.5) 3(-3.3,-1.5) 4(3.3,-1.5)
  silkscreen extent -4.44,-2.54 4.45,3, body extent -3.8,-2.29 3.7,2.21, height 3.7
TP10x_Probe [mil] "Small Probs footprint"
  round 70 hole 40: 1(-150,0) 2(-50,0) 2(50,0) 2(150,0)
  silkscreen extent -210,-95 210,55
"TVS - TESD" [mil] "TVS DIODE 5VWM 15VC SOT26"
  rect 43x24 smd mask+3: 1(-49,37) 2(-49,0) 3(-49,-37) 4(49,-37) 5(49,0) 6(49,37)
  silkscreen extent -65,-64 30,80, body extent -55,-57 55,57, height 57
"USB to serial" [mil]
  oval 24x86.61 smd: 1(-175,-117) 2(-125,-117) 3(-75,-117) 4(-25,-117) 5(25,-117) 6(75,-117) 7(125,-117) 8(175,-117) 9(175,117) 10(125,117) 11(75,117) 12(25,117) 13(-25,117) 14(-75,117) 15(-125,117) 16(-175,117)
  silkscreen extent -231,-122 201,56, body extent -197,-118 197,118, height 71
USB_MINI_B [mm]
  round 1.2 hole 0.8: 1(-1.58,2.826) 2(-0.78,1.622) 3(0.02,2.826) 4(0.82,1.622) 5(1.62,2.826)
  oval 1.2x2.4 hole 0.8 slot 1.9 at 90 deg: 6(-3.72,1.924) 7(3.72,1.924) 8(-3.72,-2.826) 9(3.72,-2.826)
  silkscreen extent -3.89,-6.42 3.93,3.3, body extent -4.04,-6.83 4.06,3.02, height 3.98

## Part data
BZ1: library part BUZZER_1, "Buzzers Transducer, Externally Driven Electromechanical/Magnetic 5 V 40mA 2.4kHz 87dB @ 5V, 10cm Through Hole PC Pins", Datasheet=https://www.puiaudio.com/media/SpecSheet/AT-1224-TWT-5V-2-R.pdf, MFR Part #=AT-1224-TWT-5V-2-R
C1 C9 C10 C11 C12 C13 C14 C15 C16 C17 C18 C19 C20 C21: library part C_22uF_1206, "22uF ±10% 25V X5R 1206 Multilayer Ceramic Capacitors MLCC - SMD/SMT RoHS", LCSC Part#=C12891, MFR Part #=CL31A226KAHNNNE, Datasheet=https://datasheet.lcsc.com/lcsc/1811031514_Samsung-Electro-Mechanics-CL31A226KAHNNNE_C12891.pdf, Type=basic
C3 C4 C5 C6: library part C_22pF_1206, "22pF ±5% 1kV C0G 1206 Multilayer Ceramic Capacitors MLCC - SMD/SMT RoHS", LCSC Part#=C107174, MFR Part #=CC1206JKNPOCBN220, Datasheet=https://datasheet.lcsc.com/lcsc/1810241219_YAGEO-CC1206JKNPOCBN220_C107174.pdf, Type=Extended
C7: library part C_1uF_1206, "MULTILAYER CERAMIC CAPACITORS MLCC - SMD/SMT 1UF 50V 1206 ROHS", LCSC Part#=C1848, MFR Part #=CL31B105KBHNNNE, Digikey Link=https://www.digikey.com/product-detail/en/C1206C105M4RACTU/399-8150-1-ND/3471873/?itemSeq=304982366, Type=Basic
C8: library part C_47nF_1206, "47nF ±5% 50V C0G 1206 Multilayer Ceramic Capacitors MLCC - SMD/SMT RoHS", LCSC Part#=C21812, MFR Part #=GRM31M5C1H473JA01L, Datasheet=https://datasheet.lcsc.com/lcsc/1810201313_Murata-Electronics-GRM31M5C1H473JA01L_C21812.pdf, Type=Extended
D1: library part D_TVS_Diode_TESD, "TVS SOT-23 ROHS", LCSC Part#=C5289077, Datasheet=https://www.lcsc.com/datasheet/C5289077.pdf, MFR Part #=TESD5V0V4UCX6, Type=Basic
D2 D3 D4 D5: library part LED_Smart, "LIGHT EMITTING DIODES (LED) RGB 620~630NM RED, 520~530NM GREEN, 465~475NM BLUE 600MCD@16MARED,1200MCD@16MAGREEN,300MCD@16MABLUE TOP VIEW SMD-4 ROHS", LCSC Part#=C2843785, Manufacturer=XINGLIGHT, MFR Part #=XL-5050RGBC-WS2812B, Datasheet=https://datasheet.lcsc.com/lcsc/2301111130_XINGLIGHT-XL-5050RGBC-WS2812B_C2843785.pdf
J1: library part J_ICSP, "Connector Header Through Hole 6 position 0.079\" (2.00mm)", LCSC Part#=C124384, Digikey Link=https://www.digikey.com/product-detail/en/NRPN032PAEN-RC/S5801-03-ND/804955/?itemSeq=304982355, MFR Part #=NRPN032PAEN-RC, Type=Extended
J2: library part J_USB_B_Mini, "Through Hole USB Connectors RoHS", LCSC Part#=C46398, MFR Part #=920-462A2021D10102, Datasheet=https://datasheet.lcsc.com/szlcsc/2103081233_Jing-Extension-of-the-Electronic-Co-920-462A2021D10102_C46398.pdf, Type=Extended
J3: library part JF_4_PIN_FEMALE, "2.54mm 3A bronze -40℃~+105℃ Straight 1x4P Top 4 1 Square Holes Straight,P=2.54mm  Female Headers ROHS", LCSC Part#=C2718488, MFR Part #=SSQ-104-01-X-SJ
L1: "25mA 10uH ±10% 800mΩ 1206  Inductors (SMD) ROHS", LCSC Part#=C1051, MFR Part #=CMI321609X100KT, Mfr_Name="FH (Guangdong Fenghua Advanced Tech)", Datasheet=https://datasheet.lcsc.com/lcsc/1810311314_FH--Guangdong-Fenghua-Advanced-Tech-CMI321609X100KT_C1051.pdf, Type=Basic
LED1 LED2 LED4 LED5 LED6: library part LED_RED_1206, "Red 621~631nm 1206 Light Emitting Diodes (LED) RoHS", LCSC Part#=C93133, MFR Part #=15-21/R6C-FQ1R1B/2T, Datasheet=https://datasheet.lcsc.com/szlcsc/1811151241_Everlight-Elec-15-21-R6C-FQ1R1B-2T_C93133.pdf, Type=Extended
P1 P3: library part "P_Power Jack", "Power Barrel Connector Jack 2.10mm ID (0.083\"), 5.50mm OD (0.217\") Through Hole, Right Angle", LCSC Part#=C136744, MFR Part #=PJ-102A, Digikey Link=https://www.digikey.com/product-detail/en/PJ-102A/CP-102A-ND/275425/?itemSeq=304982367, Type=Extended
P2: library part "P_Terminal block", "Green Straight pin 3.5mm  pitch; P=3.5mm  Screw terminal ROHS", LCSC Part#=C474892, Manufacturer="Cixi Kefa Elec", MFR Part #=KF350-3.5-2P, Datasheet=https://datasheet.lcsc.com/lcsc/2001160007_Cixi-Kefa-Elec-KF350-3-5-2P_C474892.pdf
Q1: library part Q_Nch_MOSFET, "MOSFET N Trench 30V 5.7A 1.5V @ 250uA 26.5 m? @ 5.7A,10V SOT-23-3L RoHS", LCSC Part#=C20917, Datasheet=https://datasheet.lcsc.com/szlcsc/Alpha-Omega-Semicon-AOS-AO3400A_C20917.pdf, MFR Part #=AO3400A, Type=Basic
R1 R2: library part R_1M_1206, "CHIP RESISTOR - SURFACE MOUNT 1MOHMS ±1% 1/4W 1206 ROHS", LCSC Part#=C17927, MFR Part #=RMCF1206JT1M00, Digikey Link=https://www.digikey.com/product-detail/en/RMCF1206JT1M00/RMCF1206JT1M00CT-ND/1942830/?itemSeq=304982358, Type=Basic
R3: library part R_500mOhm_1206, "Resistors/Shunt 250mW 500mΩ ±800ppm/℃ ±5% 1206  Current Sense  Resistors ROHS", LCSC Part#=C247433, MFR Part #=1206W4J050KT5E, Datasheet=https://datasheet.lcsc.com/lcsc/1810301438_UNI-ROYAL-Uniroyal-Elec-1206W4J050KT5E_C247433.pdf, Type=Extended
R4 R5 R8 R9 R10 R11 R14: library part R_1K_1206, "CHIP RESISTOR - SURFACE MOUNT 1KOHMS ±1% 1/4W 1206 ROHS", LCSC Part#=C4410, MFR Part #=RNCP1206FTD1K00CT, Digikey Link=https://www.digikey.com/product-detail/en/RNCP1206FTD1K00/RNCP1206FTD1K00CT-ND/2240675/?itemSeq=304982373, Type=Basic
R6: library part R_300Ohm_1206, "CHIP RESISTOR - SURFACE MOUNT 300OHMS ±1% 1/4W 1206 ROHS", LCSC Part#=C17887, MFR Part #=1206W4F3000T5E, Datasheet=https://datasheet.lcsc.com/szlcsc/Uniroyal-Elec-1206W4F3000T5E_C17887.pdf, Type=Basic
R7 R12 R13 R15 R18 R19: library part R_10KOhm_1206, "10 kOhms ±5% 0.25W, 1/4W Chip Resistor 1206 (3216 Metric) Automotive AEC-Q200 Thick Film", LCSC Part#=C17902, MFR Part #=RMCF1206FT10K0, Digikey Link=https://www.digikey.com/en/products/detail/stackpole-electronics-inc/RMCF1206FT10K0/1759669, Type=Basic
R16: library part R_1Ohm_1206, "1Ω ±5% 0.25W ±400ppm/℃ 1206 Chip Resistor - Surface Mount RoHS", LCSC Part#=C1409, MFR Part #=1206W4J010JT5E, Datasheet=https://datasheet.lcsc.com/lcsc/1810301410_UNI-ROYAL-Uniroyal-Elec-1206W4J010JT5E_C1409.pdf, Type=Extended
R17: library part R_10Ohm_1206, "CHIP RESISTOR - SURFACE MOUNT 0.1OHMS ±1% 1/4W 1206 ROHS", LCSC Part#=C17903, MFR Part #=1206W4F100JT5E, Datasheet=https://datasheet.lcsc.com/szlcsc/Uniroyal-Elec-1206W4F100JT5E_C17903.pdf, Type=Basic
R20 R21: library part R_0Ohm_1206, "CHIP RESISTOR - SURFACE MOUNT 0OHMS ±1% 1/4W 1206 ROHS", LCSC Part#=C17888, MFR Part #=1206W4F0000T5E, Datasheet=https://datasheet.lcsc.com/szlcsc/Uniroyal-Elec-1206W4F0000T5E_C17888.pdf, Mouser link=https://www.mouser.com/ProductDetail/Royalohm/1206W4F0000T5E?qs=e8oIoAS2J1Thbopin%252BsagQ%3D%3D, Type=Basic
SW1 SW4 SW5: library part SW_3Pin_100mil_Switch, "Connector Header Through Hole 3 position 0.100\" (2.54mm)", LCSC Part#=C49257, Digikey Link=https://www.digikey.com/product-detail/en/PREC003SAAN-RC/S1012EC-03-ND/2774851/?itemSeq=304982371, MFR Part #=PREC003SAAN-RC, Type=Extended
SW2: "2Pin Header", LCSC Part#=C124375, Type=Extended
SW3: library part SW_Push_Button_JLC, "Tactile Switch SPST-NO Top Actuated Surface Mount", LCSC Part#=C2837550, MFR Part #=KH-4.5X4.5X4.3H-STM, Datasheet=https://datasheet.lcsc.com/lcsc/2106081532_Shenzhen-Kinghelm-Elec-KH-4.5X4.5X4.3H-STM_C2837550.pdf, Type=Extended
TP2 TP3 TP4 TP5 TP6 TP7 TP8 TP9 TP10 TP11 TP12 TP13 TP14 TP15 TP16: library part TP_10x_Probe, "Test Point 300 mil centers"
U1: library part U_ATMega328P, "AVR AVR® ATmega Microcontroller IC 8-Bit 20MHz 32KB (16K x 16) FLASH 32-TQFP (7x7)", LCSC Part#=C14877, MFR Part #=ATMEGA328P-AU, Digikey Link=https://www.digikey.com/product-detail/en/ATMEGA328P-ANR/ATMEGA328P-ANRCT-ND/2774230/?itemSeq=304982365, Type=Basic
U2: library part U_USBtoSerial, "Transceiver USB 2.0 2Mbps SOP-16_150mil USB ICs RoHS", LCSC Part#=C14267, Datasheet=https://datasheet.lcsc.com/lcsc/2008191806_WCH-Jiangsu-Qin-Heng-CH340G_C14267.pdf, MFR Part #=CH340G, Type=Basic
U3: library part U_MCP4725A0T-E/CH, "IC DAC 12BIT V-OUT SOT23-6", LCSC Part#=C144198, MFR Part #=MCP4725A0T-E/CH, Datasheet=https://ww1.microchip.com/downloads/en/DeviceDoc/22039d.pdf, Type=Extended
U4: library part U_MCP6002T-I/SN, "0.6 V/us 2 1MHz 1.8V ~ 6V 100μA General Purpose SOIC-8_150mil  Operational Amplifier ROHS", LCSC Part#=C7377, Mfr=Microchip, Datasheet=https://ww1.microchip.com/downloads/en/DeviceDoc/MCP6001-1R-1U-2-4-1-MHz-Low-Power-Op-Amp-DS20001733L.pdf, MFR Part #=MCP6002T-I/SN, Type=Basic
U5: library part U_ADC_ADS1115IDGSR, "16-Bit ADC with Integrated MUX, PGA, Comparator, Oscillator, and Reference 10-VSSOP -40 to 125", LCSC Part#=C37593, Package="MSOP-10 Texas Instruments", Digikey Link=https://www.digikey.com/product-detail/en/texas-instruments/ADS1115IDGSR/296-38849-1-ND/5142969?utm_source=snapeda&utm_medium=aggregator&utm_campaign=symbol, MFR Part #=ADS1115IDGSR, SnapEDA_Link=https://www.snapeda.com/parts/ADS1115IDGSR/Texas%20Instruments/view-part/?ref=snap, Type=Extended
Y1: library part X_16Mhz_Res, "±10ppm 16000000Hz -40℃~85℃ 贴片无源晶振 60Ω 9pF SMD3225-4P Crystals ROHS", LCSC Part#=C13738, MFR Part #=X322516MLB4SI, Type=Basic
Y2: library part X_12MHz_Res, "SMD Crystal Resonators 12MHz ±10ppm SMD-3225_4P RoHS", LCSC Part#=C9002, Datasheet=https://datasheet.lcsc.com/szlcsc/Yangxing-Tech-X322512MSB4SI_C9002.pdf, MFR Part #=X322512MSB4SI, Type=Basic

## Via types
v1: diameter 28, hole 14, Layer1 to Layer4, 66 vias
v2: diameter 30, hole 16, Layer1 to Layer4, 23 vias

## Nets (pads, with @x,y where several pads share a name; then routed paths per layer and width w, separated by ;. In a path a pad name is that pad's centre, name@x,y a point inside that pad or via, vN(x,y) a via of type N, cw(c..) or ccw(c..) an arc to the next point about the centre after c; other vN are vias at no path point)
+5/USB: C1.2 C13.2 C15.2 C16.2 C17.2 C21.2 D2.1 D3.1 D4.1 D5.1 J3.1 R3.2 R7.2 SW2.1 TP10.1 U2.16 | length 9067.2
  Layer1 w20: v1(268,1486) 268.5,1485.5 D5.1@268.5,1393.7 D2.1@406.5,1393.7 406.5,1314.5 426,1295 521,1295 535.5,1280.5 D4.1@535.5,1181.3 535.7,1181.1 D3.1@668,1181.1 668,1102 670,1100 v1(670,1095) ; C1.2@1344,693 1344,590 1392,542 1437,542 SW2.1@1484,495 1544,435 1750,435 1786,399 ; R3.2@1786,306 1786,399 ; TP10.1@1982,540 1982,450 1962,430 1817,430 1786,399 ; C13.2@2629,213 2629,153.72 2640.72,142 2659.84,142 2676.84,159 v1(2679,159) 2816,159 2828,171 2898,171 2994,267 3132,267 3232,367 3232,590.19 3276.81,635 3339,635 3367,607 v1(3367,503)
  Layer4 w20: v1(268,1486) C21.2@268,1403 326.72,1403 348.72,1381 C15.2@407,1381 ; C16.2@536,1195 595,1195 614.04,1175.96 660.04,1175.96 C17.2@667,1169 667,1100.16 670,1097.16 v1(670,1095) 756,1095 803,1048 803,723 903,623 1274,623 1402,495 SW2.1@1484,495 ; J3.1@1675,1790 1745,1720 2187.28,1720 2199,1708.28 2199,1543 2350,1392 2571,1392 2637,1326 2637,1185 2716,1106 2716,986 2753,949 2821.5,949 2964.5,806 3204,806 3367,643 R7.2@3367,580 v1(3367,503) ; TP10.1@1982,540 1983,541 1983,711 2099,827 2674,827 2800,701 2800,237 2723,160 2680,160 v1(2679,159) 2679,209.15 2680.85,211 U2.16@2683,211
+5/USB_SENSE: R3.1 SW1.2 TP2.1 | length 1039.1
  Layer1 w20: TP2.1@1270,540 1438,372 1663,372 1727,308 1727,199 ; SW1.2@1617,199 1727,199 ; R3.1@1904,306 1904,228 1875,199 1727,199
+5V: LED2.1 P1.1 SW1.1 TP3.1 | length 1487.6
  Layer1 w20: TP3.1@516,474 522,468 522,351.72 533.72,340 652.14,340 663.86,328.28 663.86,302 675.86,290 893,290 963.22,360.22 P1.1@1249,360.22 1249,271 1366,154 1472,154 SW1.1@1617,299
+ARDPWR: C10.2 C11.2 C18.2 C19.2 C20.2 J1.4 L1.2 LED4.1 LED5.1 R12.2 R13.2 SW2.2 U1.4 U1.6 U3.3 U4.8 U5.8 | length 5655.4
  Layer1 w10: C18.2@1936,1236 1993,1236 1999,1230 v1(1999,1204) ; v1(2469,1087) U5.8@2469,1160
  Layer1 w20: LED4.1@809,1859 809.5,1858.5 LED5.1@809.5,1656.5 ; v1(991,1718) 929,1656 LED5.1@810,1656 810,1596 841,1565 1115,1565 1169,1511 v1(1169,1333) ; v1@1170,1333 1170,1307 1192.5,1284.5 U1.4@1243.43,1284.5 1297.38,1284.5 1309.09,1272.79 1309.09,1235.78 1294.82,1221.5 U1.6@1243.43,1221.5 ; R12.2@1936,1131 1938,1133 v1(1999,1133) ; R13.2@1936,1346 v1(1994,1346) ; U4.8@2265,1138.7 2304.54,1138.7 2314.84,1149 v1(2317,1149)
  Layer4 w10: U3.3@1922.08,1203.6 1922.28,1203.8 v1@1992,1203.8
  Layer4 w20: J1.4@980,915 980,1035 1045,1100 1084,1100 ; v1(991,1718) 1444,1718 1507,1655 2082,1655 2134,1603 2134,1453 2026,1345 ; v1(1169,1333) 1171,1331 1217,1331 1240,1308 C10.2@1240,1266 C11.2@1240,1168 ; L1.2@1343.5,1170 1294,1170 1292,1168 C11.2@1240,1168 ; SW2.2@1484,595 1478.24,600.76 1478.24,636.76 1287,828 1287,897 1084,1100 ; v1(1994,1346) 1995,1345 2026,1345 ; v1(1999,1204) v1(1999,1133) 2000,1132 2057.28,1132 ; C20.2@2469,1161 v1(2469,1087) 2417,1087 2355,1149 v1(2317,1149) 2316,1150 C19.2@2249,1150 2237,1138 2237,1122.43 2204.57,1090 2099.28,1090 2057.28,1132 ; 1084,1100 1084,1133 1119,1168 C11.2@1240,1168 ; 2026,1345 2079,1292 2079,1153.72 2057.28,1132